# Altium PCB LaunchpadStepperXY.PcbDoc
Units mm, origin at the board's own origin, x right, y up, seen from the top; angles counter-clockwise.
Board outline 57.4 x 74.68 mm, 2 copper layers (Top Layer, Bottom Layer); 20 components, 52 nets, 132 pads, 0 vias.
Unrouted connection lines stored in the file: 59.
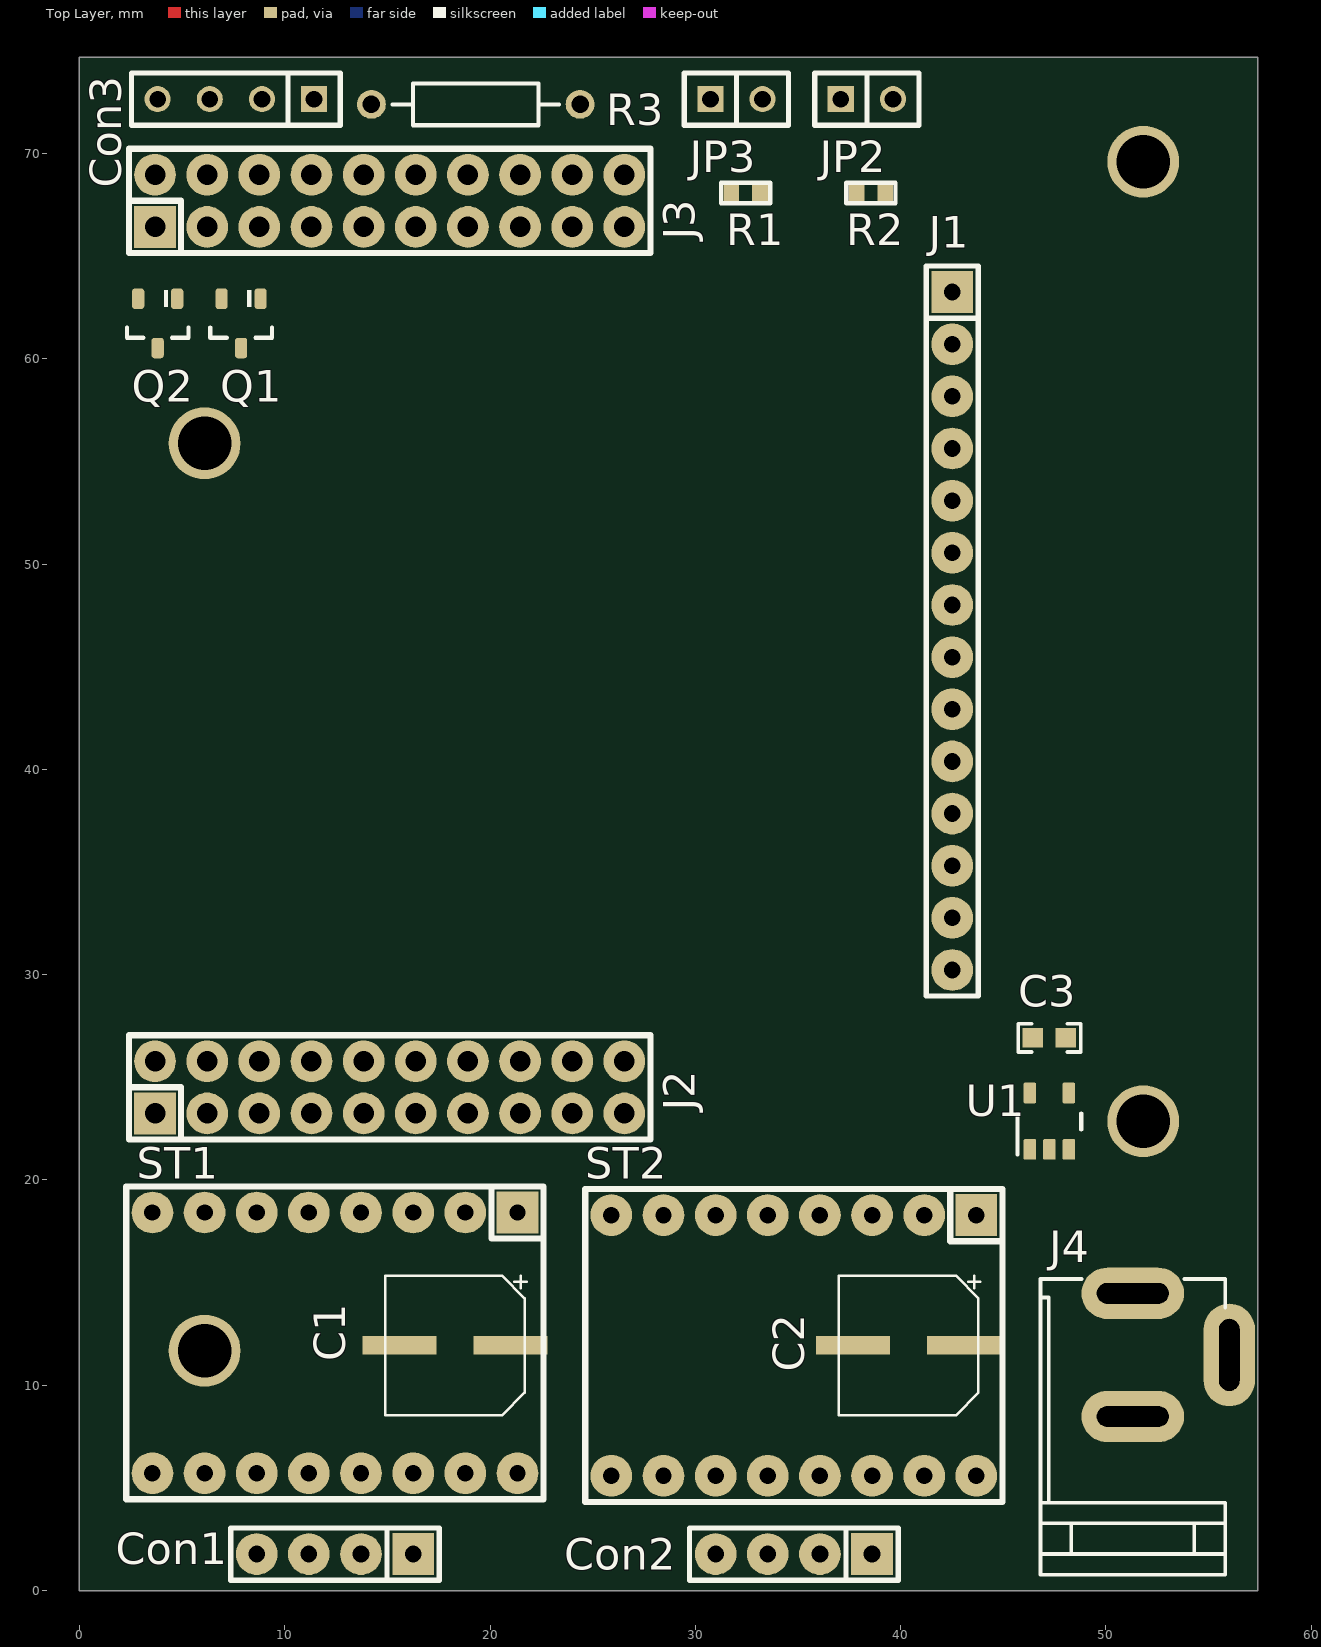
[diagram p0: Top Layer view]
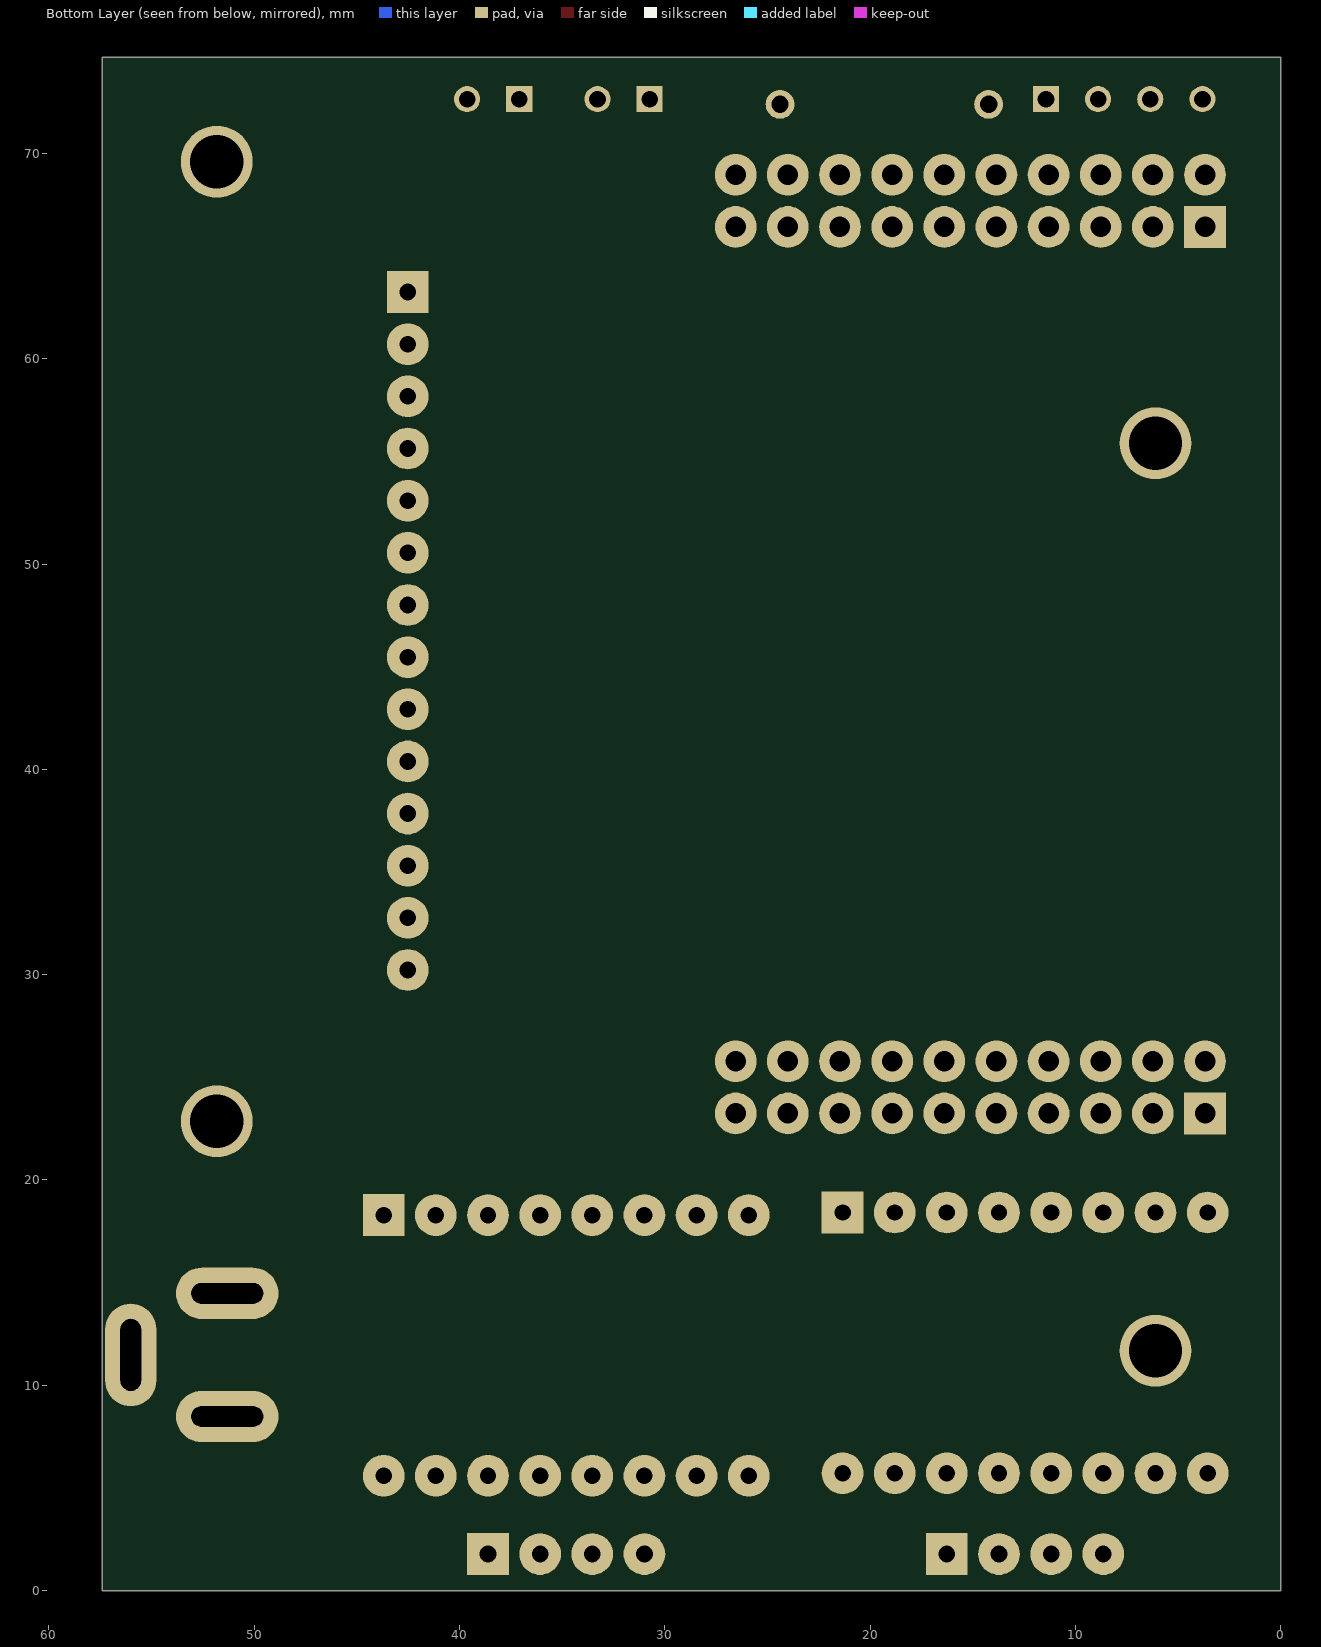
[diagram p1: Bottom Layer view, seen from below]

## Layer stack, top to bottom
Top Layer: signal copper 0.0356
Dielectric: core 0.32, FR-4, Dk 4.8
Bottom Layer: signal copper 0.0356

## Board outline
0,74.676 0,0 57.404,0 57.404,74.676

## Design rules (kind name [scope] priority, off if disabled: settings)
Clearance [All] p1: gap=0.254
MinimumSolderMaskSliver [All] p1 off: minsoldermaskwidth=0.254
PolygonConnect [All] p1: connectstyle=Relief reliefconductorwidth=0.254 reliefentries=4 polygonreliefangle="90 Angle"
RoomDefinition LaunchpadStepperXY [InComponentClass('LaunchpadStepperXY')] p1 off: confinementstyle=ConfineIn formatcopy=TRUE lockcomponents=FALSE outline 149.098,-156.718 149.098,-105.918 123.698,-105.918 123.698,-156.718
RoutingVias [All] p1: holewidth=1.016 width=2.032 viastyle="Through Hole" minholewidth=1.016 minwidth=2.032 maxholewidth=2.54 maxwidth=2.54
SilkToSilkClearance [All] p1 off: silktosilkclearance=0.254
SilkscreenOverComponentPads [All] p1 off: minsilkscreentomaskgap=0.254
SolderMaskExpansion [All] p1: expansion=0.102
Width [All] p1: maxlimit=2.54 minlimit=0.305 preferedwidth=0.305
25 further rules are at their usual default settings.

## Components (designator, comment, footprint, x,y, rotation, side; value= is the part's Value field where it differs from the comment)
C1 "47uF/16V" PanasonicD 18.288,11.938 r270 top
C2 "47uF/16V" PanasonicD 40.386,11.938 r270 top
C3 "UMK107AB7105KA-T" 0603#1 47.244,26.924 r0 top
Con1 "CON4" SIP4#1 16.256,1.778 r180 top
Con2 "CON4" SIP4#1 38.608,1.778 r180 top
Con3 "CON4" SIP4#2 11.43,72.644 r180 top
J1 "14 pin" SIP14 42.513,63.246 r270 top locked
J2 "Header 10x2" IDC20 3.683,23.241 r0 top locked
J3 "Header 10x2" IDC20 3.683,66.421 r0 top locked
J4 "PJ-202AH" CONN_CUI-PJ-202AH 51.308,14.478 r270 top
JP2 "CON2" SIP2 37.084,72.644 r0 top
JP3 "CON2" SIP2 30.734,72.644 r0 top
Q1 "SI2308BDS-T1-E3" SOT-23 7.874,61.722 r270 top
Q2 "SI2308BDS-T1-E3" SOT-23 3.81,61.722 r270 top
R1 "10K" 0603#2 31.75,68.072 r0 top
R2 "10K" 0603#2 37.846,68.072 r0 top
R3 "44R" AXIAL-0.4 19.304,72.39 r0 top
ST1 "StepStick" StepStick 21.336,18.415 r270 top
ST2 "StepStick" StepStick 43.688,18.288 r270 top
U1 "TPS73633DBV" DBV0005A_N 47.244,22.86 r90 top

## Footprints (in the part's own frame and the unit in brackets; to place one, negate y for a bottom-side part, rotate by r counter-clockwise, add the part's x,y. Pads: shape width x height; smd on the part's side, far side on the other; paste and mask are expansions set on the pad)
0603#1 [mm] "0603 from SM-752 data"
  rect 1x0.95 smd: 1(-0.8,0) 2(0.8,0)
  silkscreen extent -1.52,-0.69 1.52,0.69, body extent -0.87,-0.47 0.87,0.47, height 1
0603#2 [mm]
  rect 0.762x0.762 smd: 1(0,0) 2(1.397,0)
  silkscreen extent -0.5,-0.5 1.9,0.5, body extent -0.28,-0.38 1.67,0.38, height 0.5
AXIAL-0.4 [mm] "Axial Device, Thru-Hole; 2 Leads; 0.4 in Pin Spacing"
  round 1.4 hole 0.85: 1(-5.08,0) 2(5.08,0)
  silkscreen extent -4.06,-1.02 4.06,1.02
CONN_CUI-PJ-202AH [mm] "Conn_DC Jack"
  oval 2.5x5 hole 1 slot 3.5 at 90 deg: 1(0,0) 2(6,0)
  oval 5x2.5 hole 1 slot 3.5 at 0 deg: 3(3,4.7)
  silkscreen extent -0.7,-4.5 13.7,4.5, body extent -0.7,-4.5 13.7,4.9, height 11.02
DBV0005A_N [mm]
  rrect17% 1x0.6 smd: 1(-1.375,0.95) 2(-1.375,0) 3(-1.375,-0.95) 4(1.375,-0.95) 5(1.375,0.95)
  silkscreen extent -1.63,-1.55 0.38,1.55, body extent -1.42,-1.46 1.42,1.46, height 1.09
IDC20 [mil]
  rect 80x80 hole 39.37: 1(0,0)
  round 80 hole 39.37: 2(0,100) 3(100,0) 4(100,100) 5(200,0) 6(200,100) 7(300,0) 8(300,100) 9(400,0) 10(400,100) 11(500,0) 12(500,100) 13(600,0) 14(600,100) 15(700,0) 16(700,100) 17(800,0) 18(800,100) 19(900,0) 20(900,100)
  silkscreen extent -50,-50 950,150, body extent -50,-50 950,150, height 315
PanasonicD [mm]
  rect 0.9x3.6 smd: 1(0,2.7) 2(0,-2.7)
  silkscreen extent -3.4,-3.4 3.4,3.5, body extent -3.18,-3.18 3.2,3.21, height 6
SIP2 [mil]
  rect 50x50 hole 32: 1(0,0)
  round 50 hole 32: 2(100,0)
  silkscreen extent -50,-50 150,50
SIP4#1 [mil]
  rect 80x80 hole 32: 1(0,0)
  round 80 hole 32: 2(100,0) 3(200,0) 4(300,0)
  silkscreen extent -50,-50 350,50
SIP4#2 [mil]
  rect 50x50 hole 32: 1(0,0)
  round 50 hole 32: 2(100,0) 3(200,0) 4(300,0)
  silkscreen extent -50,-50 350,50
SIP14 [mil]
  rect 80x80 hole 32: 1(0,0)
  round 80 hole 32: 2(100,0) 3(200,0) 4(300,0) 5(400,0) 6(500,0) 7(600,0) 8(700,0) 9(800,0) 10(900,0) 11(1000,0) 12(1100,0) 13(1200,0) 14(1300,0)
  silkscreen extent -50,-50 1350,50
SOT-23 [mm] "SOT23, 3-Leads, Body 2.9x1.3mm, Pitch 0.95mm, Lead Span 2.5mm, IPC Medium Density"
  rrect50% 1x0.6 smd: 1(-1.2,0.95) 2(-1.2,-0.95) 3(1.2,0)
  silkscreen extent -1.63,-1.5 0.7,1.5, body extent -1.16,-1.45 1.21,1.45, height 1
StepStick [mil]
  rect 80x80 hole 31.5: 1(0,0)
  round 80 hole 31.5: 2(0,-100) 3(0,-200) 4(0,-300) 5(0,-400) 6(0,-500) 7(0,-600) 8(0,-700) 9(500,-700) 10(500,-600) 11(500,-500) 12(500,-400) 13(500,-300) 14(500,-200) 15(500,-100) 16(500,0)
  silkscreen extent -50,-750 550,50, body extent -15,-715 515,15, height 315

## Part data
C1 C2: library part C_POL, "Polarized Capacitor"
C3: "CAP, CERM, 1 µF, 50 V, +/- 10%, X7R, 0603"
J1: library part CON14, "Connector"
J4: "Connector, DC Jack 2.1X5.5 mm, TH"
JP2 JP3: "Connector"
Q1 Q2: "MOSFET, N-CH, 60 V, 2.3 A, SOT-23"
R1 R2: library part RES, "Resistor"
R3: library part Res2, "Resistor"
ST1 ST2: library part CON14_1, "Connector"
U1: "Cap-Free, NMOS, 400mA Low-Dropout Regulator with Reverse Current Protection, DBV0005A"

## Free pads (board coordinates)
  round 3.5 hole 2.6: 0(6.096,11.684) 0(6.096,55.88) 0(51.816,22.86) 0(51.816,69.596)

## Nets (pads, with @x,y where several pads share a name; then routed paths per layer and width w, separated by ;. In a path a pad name is that pad's centre, name@x,y a point inside that pad or via, vN(x,y) a via of type N, cw(c..) or ccw(c..) an arc to the next point about the centre after c; other vN are vias at no path point)
BL_LED: J1.1 J1.8 J2.1 R1.1 R2.1 ST1.2 ST1.3 ST1.4 ST1.6 ST1.10 ST2.2 ST2.3 ST2.4 ST2.6 ST2.10
D/C: J1.5 J2.19
GND: C1.2 C2.2 C3.2 J1.2 J2.4 J3.2 J4.2 J4.3 JP2.1 JP3.1 Q1.2 Q2.2 ST1.9 ST1.15 ST2.9 ST2.15 U1.2
LCD_CD: J1.3 J3.18
LCD_MISO: J1.9 J1.13 J3.16
LCD_MOSI: J1.6 J1.12 J2.15
LCD_SCK: J1.7 J1.10 J3.20
NetCon1_1: Con1.1 ST1.14
NetCon1_2: Con1.2 ST1.13
NetCon1_3: Con1.3 ST1.12
NetCon1_4: Con1.4 ST1.11
NetCon2_1: Con2.1 ST2.14
NetCon2_2: Con2.2 ST2.13
NetCon2_3: Con2.3 ST2.12
NetCon2_4: Con2.4 ST2.11
NetCon3_2: Con3.2 Q1.3
NetCon3_3: Con3.3 R3.1
NetCon3_4: Con3.4 Q2.3
P3V3: C3.1 U1.5
P12V: C1.1 C2.1 Con3.1 J4.1 R3.2 ST1.16 ST2.16 U1.1 U1.3
PA6: J1.11 J2.17
PB0: J2.5
PB1: J2.7
PB2: J3.4
PB3: J3.5
PB4: J2.13 ST2.7
PB5: J2.3
PB6: J3.14
PB7: J3.12
PC4: J3.7
PC5: J3.9
PC6: J3.11
PC7: J3.13 JP2.2 R2.2
PD0: J2.6 ST1.8
PD1: J2.8 ST1.7
PD2: J2.10 ST1.5 ST2.5
PD3: J2.12
PD6: J3.15 JP3.2 R1.2
PD7: J3.17 ST2.8
PE0: J3.6
PE1: J2.14
PE2: J2.16
PE3: J2.18
PE4: J2.9
PE5: J2.11
PF0: J1.14 J3.8
PF1: J2.20
PF2: J3.1 Q2.1
PF3: J3.3 Q1.1
PF4: J3.19 ST1.1 ST2.1
R\E\S\E\T\: J1.4 J3.10
V5V: J2.2
pads on no net: U1.4

## Text inside footprints (layer, text, board x,y; h text height)
J4: Mechanical 1 "board edge" at 43.508,-0.722 h0.89